# Altium PCB Buck_Converter_PCB.PcbDoc
Units mm, origin at the board's own origin, x right, y up, seen from the top; angles counter-clockwise.
Board outline 150 x 100 mm, 2 copper layers (Top Layer, Bottom Layer); 59 components, 30 nets, 152 pads, 6 vias.
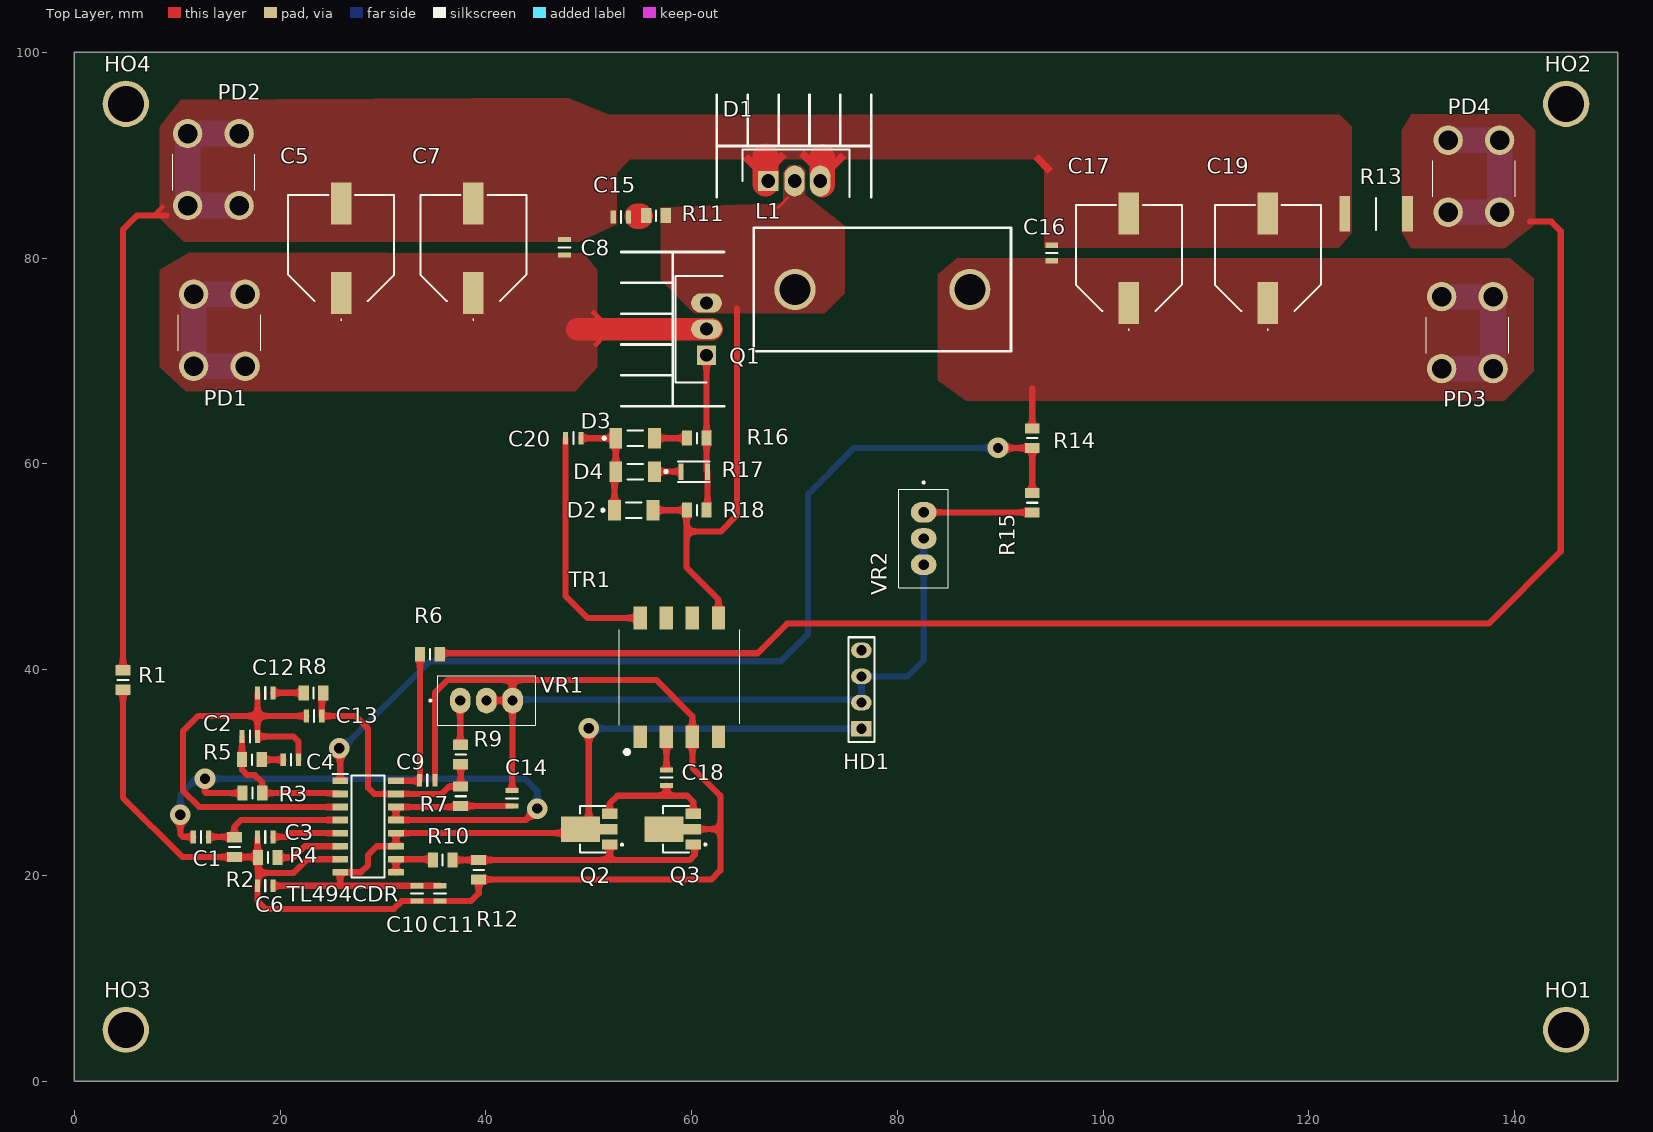
[diagram p0: Top Layer view]
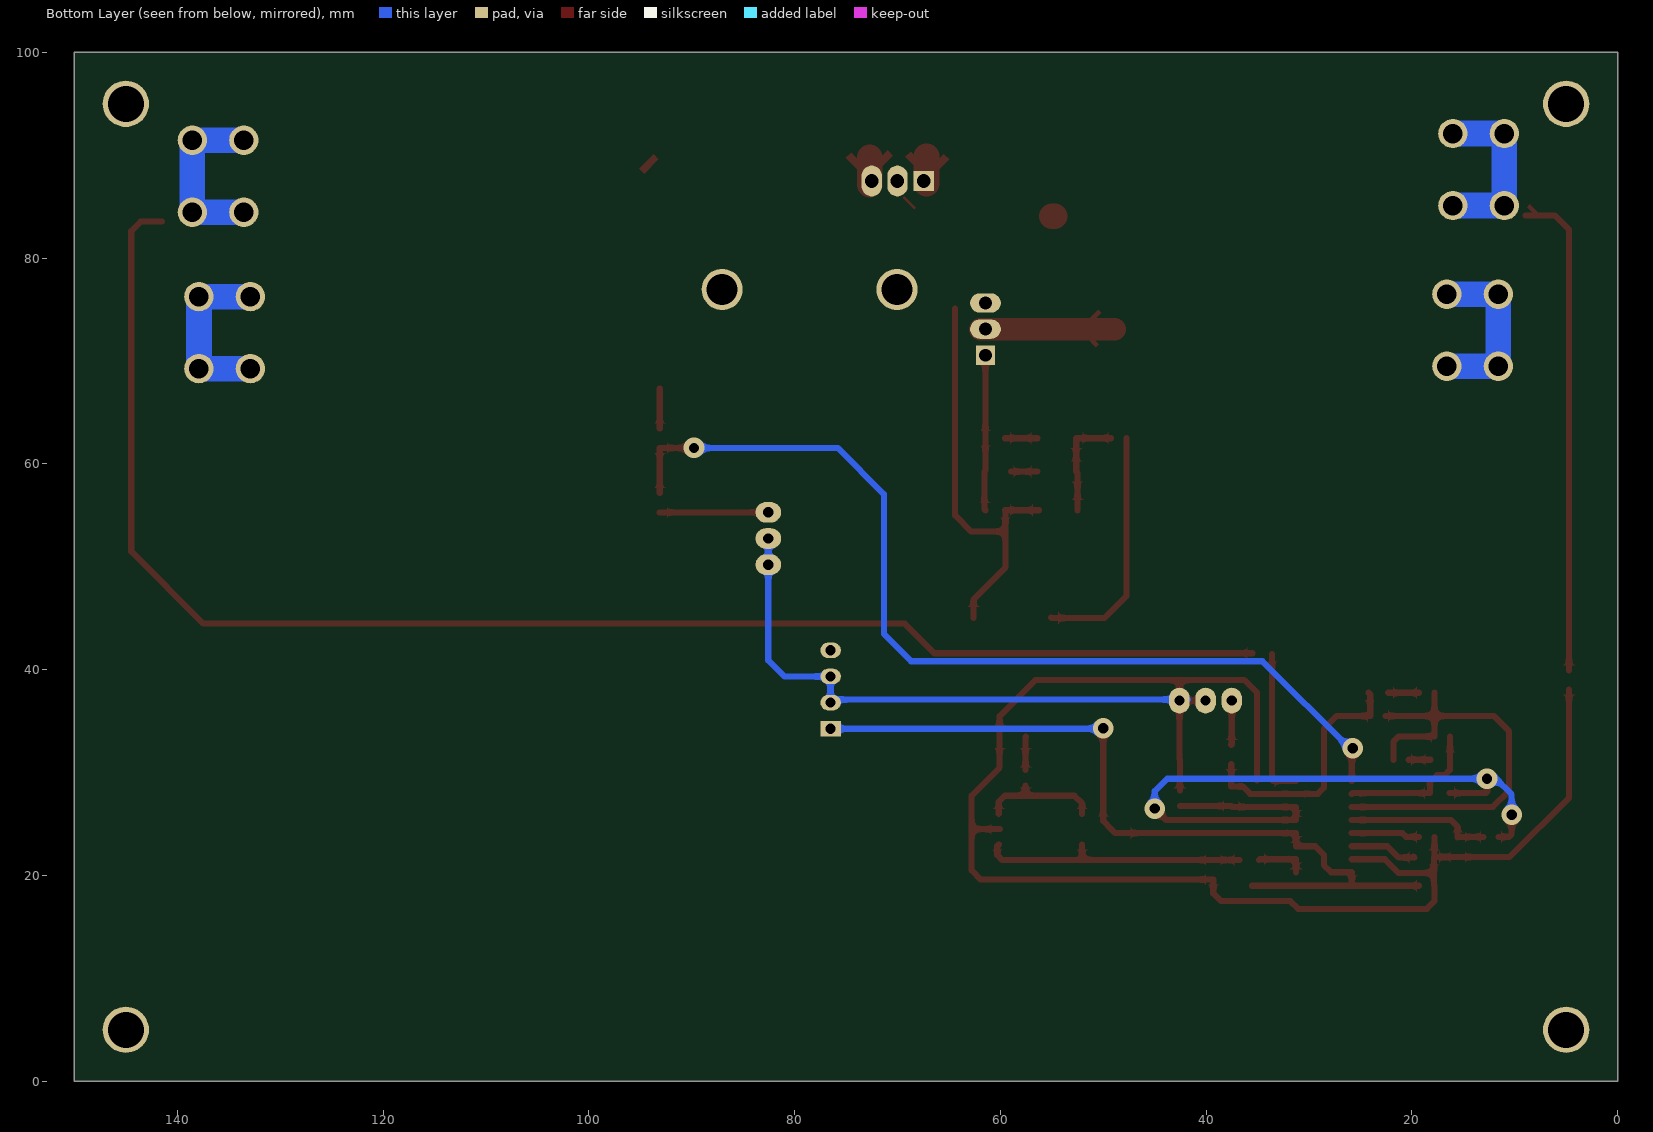
[diagram p1: Bottom Layer view, seen from below]

## Layer stack, top to bottom
Top Solder: solder mask 0.0102, Solder Resist, Dk 3.5
Top Layer: signal copper 0.0356
Dielectric 1: dielectric 0.32, FR-4, Dk 4.8
Bottom Layer: signal copper 0.0356
Bottom Solder: solder mask 0.0102, Solder Resist, Dk 3.5

## Board outline
0,0 150,0 150,100 0,100

## Design rules (kind name [scope] priority, off if disabled: settings)
Clearance [All] p1: gap=0.01
ComponentClearance [All] p1: gap=0.01 collisioncheckmode=3 verticalgap=0.254 showdistances=FALSE
HoleSize [All] p1: absolutevalues=TRUE maxlimit=4 minlimit=0.001 maxpercent=80.000 minpercent=20.000
MinimumSolderMaskSliver [All] p1: minsoldermaskwidth=0.001
PolygonConnect [All] p1: connectstyle=Direct reliefconductorwidth=0.254 reliefentries=4 polygonreliefangle="90 Angle" airgapwidth=0.254
RoutingVias [All] p1: holewidth=0.711 width=1.27 viastyle="Through Hole" minholewidth=0.711 minwidth=1.27 maxholewidth=0.711 maxwidth=1.27
SilkToSilkClearance [All] p1: silktosilkclearance=0.001
SilkToSolderMaskClearance [IsPad] p1: minsilkscreentomaskgap=0.001 clearancetoexposedcopper=TRUE
SolderMaskExpansion [All] p1: expansion=0.102
Width [All] p1: maxlimit=2.5 minlimit=0.254 preferedwidth=0.254
25 further rules are at their usual default settings.

## Components (designator, comment, footprint, x,y, rotation, side; value= is the part's Value field where it differs from the comment)
C1 "1uF" Capacitors_SMD_0805 12.3,23.75 r180 top
C2 "150pF" Capacitors_SMD_0805 17.05,33.5 r0 top
C3 "1nF" Capacitors_SMD_0805 18.55,23.75 r0 top
C4 "100nF" Capacitors_SMD_0805 21.05,31.25 r0 top
C5 "330uf" Capacitors_SMD_D10 25.933,80.975 r90 top
C6 "1uF" Capacitors_SMD_0805 18.55,19 r0 top
C7 "330uf" Capacitors_SMD_D10 38.786,80.975 r90 top
C8 "100nF" Capacitors_SMD_0805 47.625,81.051 r90 top
C9 "1nF" Capacitors_SMD_0805 34.3,29.25 r180 top
C10 "1uF" Capacitors_SMD_0805 33.3,18.25 r90 top
C11 "100nF" Capacitors_SMD_0805 35.55,18.25 r90 top
C12 "100nF" Capacitors_SMD_0805 18.55,37.75 r180 top
C13 "680pF" Capacitors_SMD_0805 23.3,35.5 r0 top
C14 "100nF" Capacitors_SMD_0805 42.55,27.5 r90 top
C15 "1nF" Capacitors_SMD_0805 53.125,84 r180 top
C16 "100nF" Capacitors_SMD_0805 95,80.5 r270 top
C17 "330uF" Capacitors_SMD_D10 102.5,80 r90 top
C18 "100nF" Capacitors_SMD_0805 57.55,29.5 r90 top
C19 "330uF" Capacitors_SMD_D10 116,80 r90 top
C20 "100nF" Capacitors_SMD_0805 48.5,62.5 r0 top
D1 "STPS20H100C" TO-220_Diode 70,87.5 r0 top
D2 "1N4148" 1N4148 54.375,55.5 r0 top
D3 "1N4148" 1N4148 54.5,62.5 r0 top
D4 "1N4148" 1N4148 54.5,59.25 r180 top
HD1 "Header 4" HDR1X4 76.5,34.26 r90 top
HO1 "HOLE" Hole 145,5 r0 top
HO2 "HOLE" Hole 145,95 r0 top
HO3 "HOLE" Hole 5,5 r0 top
HO4 "HOLE" Hole 5,95 r0 top
L1 "Inductor" Inductor 78.537,76.962 r0 top
PD1 "Terminal" Terminal 11.596,69.494 r0 top
PD2 "Terminal" Terminal 11.012,85.11 r0 top
PD3 "Terminal" Terminal 132.897,69.26 r0 top
PD4 "Terminal" Terminal 133.532,84.462 r0 top
Q1 "N-MOSFET" TO-220)N-MOSFET 61.443,73.101 r90 top
Q2 "2SCR552P" 2SCR552P 50.05,24.5 r90 top
Q3 "2SAR552P" 2SAR552P 58.15,24.5 r90 top
R1 "0R" RESISTOR_SMD_0805 4.725,39 r270 top
R2 "1K" RESISTOR_SMD_0805 15.55,22.75 r90 top
R3 "3K" RESISTOR_SMD_0805 17.3,28 r0 top
R4 "10K" RESISTOR_SMD_0805 18.8,21.75 r0 top
R5 "20K" RESISTOR_SMD_0805 17.25,31.25 r180 top
R6 "1K" RESISTOR_SMD_0805 34.55,41.5 r180 top
R7 "24K" RESISTOR_SMD_0805 37.55,27.7 r90 top
R8 "10K" RESISTOR_SMD_0805 23.25,37.75 r180 top
R9 "22R" RESISTOR_SMD_0805 37.55,31.75 r90 top
R10 "22R" RESISTOR_SMD_0805 35.8,21.5 r0 top
R11 "10R" RESISTOR_SMD_0805 56.525,84.125 r0 top
R12 "1K" RESISTOR_SMD_0805 39.3,20.55 r90 top
R13 "0R01" RESISTOR_SMD_2512 126.525,84.3 r0 top
R14 "15K" RESISTOR_SMD_0805 93.1,62.5 r90 top
R15 "1K5" RESISTOR_SMD_0805 93.1,56.225 r90 top
R16 "4R7" RESISTOR_SMD_0805 60.5,62.5 r0 top
R17 "4R7" RESISTOR_SMD_1206 60.25,59.25 r0 top
R18 "10K" RESISTOR_SMD_0805 60.5,55.5 r0 top
TL494CDR "TL494CDR" TL494CDR 28.55,24.75 r0 top
TR1 "B78307A2276A003" B78307A2276A003 58.8,39.25 r0 top
VR1 "5K" Baoter_3296 37.51,37 r180 top
VR2 "5K" Baoter_3296 82.55,55.29 r90 top

## Footprints (in the part's own frame and the unit in brackets; to place one, negate y for a bottom-side part, rotate by r counter-clockwise, add the part's x,y. Pads: shape width x height; smd on the part's side, far side on the other; paste and mask are expansions set on the pad)
1N4148 [mm]
  rect 1.25x2 smd: A(1.875,0) K(-1.875,0)
  silkscreen extent -3.12,-0.75 0.75,0.75, body extent -1.85,-0.8 1.85,0.8, height 1.6
2SAR552P [mm]
  rect 1x1.5 smd: 1(-1.5,-2) 3(1.5,-2)
  rect 2.5x3.8 smd: 2(0,0.85)
  rect 1x1.7 smd: 2(0,-1.9)
  silkscreen extent -2.25,-3.27 2.25,0.92, body extent -2.27,-2.27 2.27,1.73, height 1.6
2SCR552P [mm]
  rect 1x1.5 smd: 1(-1.5,-2) 3(1.5,-2)
  rect 2.5x3.8 smd: 2(0,0.85)
  rect 1x1.7 smd: 2(0,-1.9)
  silkscreen extent -2.25,-3.27 2.25,0.92, body extent -2.27,-2.27 2.27,1.73, height 1.6
B78307A2276A003 [mm]
  rect 1.3x2.21 smd: 1(-3.81,-5.77) 2(-1.27,-5.77) 3(1.27,-5.77) 4(3.81,-5.77) 5(3.81,5.77) 6(1.27,5.77) 7(-1.27,5.77) 8(-3.81,5.77)
  silkscreen extent -5.85,-7.3 5.85,4.65, body extent -5.94,-6.79 5.76,6.37, height 11.35
Baoter_3296 [mm]
  oval 2x2.5 hole 1: 1(0,0) 2(-2.54,0) 3(-5.08,0)
  silkscreen extent -7.3,-2.41 3,2.42
Capacitors_SMD_0805 [mm]
  rect 0.5x1.25 smd: 1(-0.75,0) 2(0.75,0)
  silkscreen extent 0,-0.58 0,0.58
Capacitors_SMD_D10 [mm]
  rect 4.1x2 smd: 1(-4.35,0) 2(4.35,0)
  silkscreen extent -7,-5.15 5.15,5.15
HDR1X4 [mm] "Connector; Header; 4 Position"
  rect 1.5x2 hole 1: 1(0,0)
  oval 1.5x2 hole 1: 2(2.54,0) 3(5.08,0) 4(7.62,0)
  silkscreen extent -1.27,-1.27 8.89,1.27
Hole [mm]
  round 4.5 hole 3.5: 1(0,0)
Inductor [mm]
  round 4 hole 3: 1(-8.5,0) 2(8.5,0)
  silkscreen extent -12.5,-6 12.5,6
RESISTOR_SMD_0805 [mm]
  rect 1x1.45 smd: 1(-0.95,0) 2(0.95,0)
  silkscreen extent 0,-0.53 0,0.53
RESISTOR_SMD_1206 [mm]
  rect 0.5x1.6 smd: 1(-1.3,0) 2(1.3,0)
  silkscreen extent -1.6,-1 1.5,1
RESISTOR_SMD_2512 [mm]
  rect 1.05x3.45 smd: 1(-3.05,0) 2(3.05,0)
  silkscreen extent 0,-1.55 0,1.55
Terminal [mm]
  round 2.85 hole 1.9: 1(0,0) 1(0,7) 1(5,0) 1(5,7)
  silkscreen extent -1.5,1.5 6.5,5
TL494CDR [mm]
  rect 1.525x0.65 smd: 1(-2.712,4.445) 2(-2.712,3.175) 3(-2.712,1.905) 4(-2.712,0.635) 5(-2.712,-0.635) 6(-2.712,-1.905) 7(-2.712,-3.175) 8(-2.712,-4.445) 9(2.712,-4.445) 10(2.712,-3.175) 11(2.712,-1.905) 12(2.712,-0.635) 13(2.712,0.635) 14(2.712,1.905) 15(2.712,3.175) 16(2.712,4.445)
  silkscreen extent -3.47,-4.95 1.6,5.12
TO-220)N-MOSFET [mm]
  rect 1.875x1.875 / inner round 1.875 / far side rect 1.875x1.875 hole 1.25: 1(-2.54,0)
  oval 1.875x3 hole 1.25: 2(0,0) 3(2.54,0)
  silkscreen extent -7.5,-1.7 7.5,8.3
TO-220_Diode [mm]
  rect 1.98x1.98 / inner round 1.98 / far side rect 1.98x1.98 hole 1.32: A1(-2.55,0)
  oval 1.98x3 hole 1.32: A2(2.5,0) K(0,0)
  silkscreen extent -7.55,-1.6 7.45,8.4

## Part data
C1: library part C1, "SMD_0805"
C2: library part C2, "SMD_0805"
C3: library part C3, "SMD_0805"
C4: library part C4, "SMD_0805"
C5: library part C5, "SMD_D10"
C6: library part C6, "SMD_0805"
C7: library part C7, "SMD_D10"
C8: library part C8, "SMD_0805"
C9: library part C9, "SMD_0805"
C10: library part C10, "SMD_0805"
C11: library part C11, "SMD_0805"
C12: library part C12, "SMD_0805"
C13: library part C13, "SMD_0805"
C14: library part C14, "SMD_0805"
C15: library part C15, "SMD_0805"
C16: library part C16, "SMD_0805"
C17: library part C17, "SMD_D10"
C18: library part C18, "SMD_0805"
C19: library part C19, "SMD_D10"
C20: library part C20, "SMD_0805"
D1: library part D1, "Schottky"
D2: library part D2, "Diode"
D3: library part D3, "Diode"
D4: library part D4, "Diode"
HD1: "Header, 4-Pin"
HO1: library part HO1
HO2: library part HO2
HO3: library part HO3
HO4: library part HO4
L1: library part L1
PD1: library part PD1
PD2: library part PD2
PD3: library part PD3
PD4: library part PD4
Q1: library part Q1
Q2: library part Q2, "NPN-BJT"
Q3: library part Q3, "PNP-BJT"
R1: library part R1, "SMD_0805"
R2: library part R2, "SMD_0805"
R3: library part R3, "SMD_0805"
R4: library part R4, "SMD_0805"
R5: library part R5, "SMD_0805"
R6: library part R6, "SMD_0805"
R7: library part R7, "SMD_0805"
R8: library part R8, "SMD_0805"
R9: library part R9, "SMD_0805"
R10: library part R10, "SMD_0805"
R11: library part R11, "SMD_0805"
R12: library part R12, "SMD_0805"
R13: library part R13, "SMD_2512"
R14: library part R14, "SMD_0805"
R15: library part R15, "SMD_0805"
R16: library part R16, "SMD_0805"
R17: library part R17, "SMD_1206"
R18: library part R18, "SMD_0805"
TL494CDR: "PWM_controller"
TR1: library part TR1, "SMDTransformers"
VR1: library part VR1, "Baoter_3296"
VR2: library part VR2, "Baoter_3296"

## Via types
v1: diameter 2, hole 1, Top Layer to Bottom Layer, 6 vias

## Nets (pads, with @x,y where several pads share a name; then routed paths per layer and width w, separated by ;. In a path a pad name is that pad's centre, name@x,y a point inside that pad or via, vN(x,y) a via of type N, cw(c..) or ccw(c..) an arc to the next point about the centre after c; other vN are vias at no path point)
5V: C1.2 C14.1 R3.1 R7.1 TL494CDR.13 TL494CDR.14 | length 75.3
  Top Layer w0.6: v1@9.7,25.6 10,25.9 v1(10.3,25.9) 10.3,24 10.55,23.75 C1.2 ; v1(12.7,29.4) 12.7,28.1 12.8,28 14.55,28 R3.1 ; C14.1 R7.1 37.455,26.655 TL494CDR.14 TL494CDR.13 43.885,25.385 v1(45,26.5)
  Bottom Layer w0.6: v1(10.3,25.9) 10.3,27.877 11.823,29.4 v1(12.7,29.4) 43.777,29.4 45,28.177 v1(45,26.5)
12V: C6.2 C10.2 C11.2 HD1.1 Q2.2 TL494CDR.8 TL494CDR.11 TL494CDR.12 | length 80.4
  Top Layer w0.6: C6.2 C10.2 C11.2 ; 25.8,19.25 25.838,19.288 TL494CDR.8 27.855,20.305 28.55,21 28.55,22 29.395,22.845 TL494CDR.11 TL494CDR.12 48.815,24.115 49.2,24.5 50,25.3 v1(50,34.3)
  Bottom Layer w0.6: v1(50,34.3) 50.04,34.26 HD1.1
AG: C3.1 C6.1 C9.1 C10.1 C11.1 C14.2 HD1.2 HD1.3 Q3.2 R1.2 R2.1 R4.1 R12.1 TL494CDR.7 TR1.3 VR1.2 VR1.3 VR2.2 VR2.3 | length 211.9
  Top Layer w0.6: R1.2 4.725,27.575 10.5,21.8 R2.1 17.8,21.8 C3.1 ; R4.1 17.85,20.25 ; TL494CDR.7 22.625,21.575 21.3,20.25 17.85,20.25 ; C9.1 35.05,37.75 36.3,39 42.59,39 ; VR1.2 VR1.3 ; C14.2 42.55,31.25 42.59,31.29 VR1.3 ; Q3.2@60.05,24.5 62.8,24.5 ; 17.85,20.25 17.85,19.05 C6.1 17.8,17.5 18.55,16.75 31.05,16.75 31.8,17.5 C10.1 C11.1 38.55,17.5 39.3,18.25 R12.1 61.9,19.6 62.8,20.5 62.8,24.5 ; VR1.3 42.59,39 ; 42.59,39 56.55,39 60.07,35.48 TR1.3 60.07,30.48 62.8,27.75 62.8,24.5
  Bottom Layer w0.6: VR1.3@41.79,37.1 76.2,37.1 HD1.2 HD1.3 80.99,39.34 82.55,40.9 VR2.3 VR2.2
CS: PD4.1 R6.1 R13.2 | length 164.6
  Top Layer w0.6: R6.1@35.5,41.6 66.4,41.6 69.275,44.475 137.45,44.475 144.475,51.5 144.475,82.625 143.55,83.55 141.5,83.55
  Bottom Layer w2.5: PD4.1@133.532,84.462 138.532,84.462 138.532,91.462 PD4.1@133.532,91.462
GATE: Q1.1 R16.2 R17.2 R18.2 | length 15.1
  Top Layer w0.6: Q1.1 61.45,70.554 R16.2 61.45,59.35 R17.2 61.55,55.6 R18.2
NetC1_1: C1.1 R2.2 TL494CDR.4 | length 14.1
  Top Layer w0.6: C1.1 15.5,23.75 R2.2 15.55,24.75 16.185,25.385 TL494CDR.4
NetC2_1: C2.1 R3.2 R5.2 TL494CDR.2 | length 14.4
  Top Layer w0.6: C2.1 R5.2 16.3,30.25 16.8,29.75 17.55,29.75 18.25,29.05 R3.2 25.763,28 TL494CDR.2
NetC2_2: C2.2 C4.2 C12.2 C13.1 TL494CDR.3 | length 44.5
  Top Layer w0.6: C12.2 17.8,35.5 ; C4.2 21.8,33 21.3,33.5 C2.2 17.8,35.5 ; C13.1 17.8,35.5 ; TL494CDR.3 12.145,26.655 10.55,28.25 10.55,34 12.05,35.5 17.8,35.5
NetC3_2: C3.2 TL494CDR.5 | length 6.7
  Top Layer w0.6: C3.2 20.55,23.75 20.915,24.115 TL494CDR.5
NetC4_1: C4.1 R5.1 | length 2.1
  Top Layer w0.6: R5.1 C4.1
NetC5_1: C5.1 C7.1 C8.1 PD1.1 Q1.2 | length 30
  Top Layer w2.2: 48.895,73.101 Q1.2 Q1.2@61.925,73.101
  Bottom Layer w2.5: PD1.1@16.596,69.494 11.596,69.494 11.596,76.494 PD1.1@16.596,76.494
NetC9_2: C9.2 R6.2 TL494CDR.16 | length 14.6
  Top Layer w0.6: TL494CDR.16 33.495,29.195 C9.2 33.6,29.3 R6.2
NetC12_1: C12.1 R8.2 | length 3
  Top Layer w0.6: C12.1 R8.2
NetC13_2: C13.2 R7.2 R8.1 R9.1 TL494CDR.15 | length 24.8
  Top Layer w0.6: R8.1 24.05,37.6 C13.2 27.3,35.5 28.55,34.25 28.55,28.5 29.125,27.925 TL494CDR.15 35.725,27.925 36.45,28.65 R7.2 R9.1
NetC15_1: C15.1 R11.1 | length 0.2
  Top Layer w2.5: 54.725,84.075 54.975,84.075
NetC16_2: C16.2 C17.1 C19.1 L1.2 PD3.1 R14.2 | length 20.9
  Top Layer w0.6: R14.2 93.1,67.325
  Bottom Layer w2.5: PD3.1@132.897,69.26 137.897,69.26 137.897,76.26 PD3.1@132.897,76.26
NetC18_1: C18.1 Q2.3 Q3.3 | length 11.8
  Top Layer w0.6: Q2.3 52.05,27 52.8,27.75 57.55,27.75 ; C18.1 57.55,27.75 ; Q3.3 60.15,27.15 59.55,27.75 57.55,27.75
NetC18_2: C18.2 TR1.2 | length 3.2
  Top Layer w0.6: TR1.2 57.55,33.46 C18.2
NetC20_1: C20.1 TR1.8 | length 23.6
  Top Layer w0.6: C20.1 47.75,47.15 49.88,45.02 TR1.8 TR1.8@55.05,45.08
NetC20_2: C20.2 D2.K D3.K D4.A | length 10.4
  Top Layer w0.6: C20.2 D3.K D4.A 52.5,59.125 D2.K
NetD3_A: D3.A R16.1 | length 3.2
  Top Layer w0.6: D3.A R16.1
NetD4_K: D4.K R17.1 | length 2.6
  Top Layer w0.6: D4.K R17.1
NetQ2_1: Q2.1 Q3.1 R10.2 R12.2 | length 26.3
  Top Layer w0.6: R10.2 R12.2 52.05,21.5 ; Q2.1 52.05,21.5 ; Q3.1 60.3,22.85 60.3,22 59.8,21.5 52.55,21.5 52.05,21.5
NetR4_2: R4.2 TL494CDR.6 | length 6.7
  Top Layer w0.6: R4.2@19.845,21.845 R4.2 21.3,21.75 22.395,22.845 TL494CDR.6
NetR9_2: R9.2 VR1.1 | length 4.3
  Top Layer w0.6: VR1.1 37.51,32.74 R9.2
NetR10_1: R10.1 TL494CDR.9 TL494CDR.10 | length 4.9
  Top Layer w0.6: TL494CDR.9 TL494CDR.10 34.775,21.575 R10.1
NetR15_1: R15.1 VR2.1 | length 10.6
  Top Layer w0.6: VR2.1 93.085,55.29 R15.1
PG: C5.2 C7.2 C8.2 C15.2 C16.1 C17.2 C19.2 D1.A1 D1.A2 PD2.1 R1.1 R13.1 | length 69.9
  Top Layer w0.6: R1.1 4.725,82.75 6.125,84.15 8.925,84.15
  Top Layer w2.5: D1.A1@67.175,87.25 67.175,89.9 ; D1.A2@72.7,87.125 72.7,89.775
  Bottom Layer w2.5: PD2.1@16.012,85.11 11.012,85.11 11.012,92.11 PD2.1@16.012,92.11
REF: D1.K D2.A L1.1 Q1.3 R11.2 R18.1 TR1.5 | length 40.7
  Top Layer w0.6: D2.A R18.1 59.5,55.45 59.5,53.425 ; TR1.5 62.61,46.81 59.5,49.92 59.5,53.425 ; 64.4,75.075 64.4,55 62.825,53.425 59.5,53.425
VFB: R14.1 R15.2 TL494CDR.1 | length 95
  Top Layer w0.6: v1(25.756,32.36) 25.838,32.277 TL494CDR.1 ; v1(89.775,61.55) R14.1 R15.2
  Bottom Layer w0.6: v1(25.756,32.36) 26.06,32.36 34.521,40.82 68.67,40.82 71.32,43.47 71.32,57.07 75.8,61.55 v1(89.775,61.55)
pads on no net: HD1.4 HO1.1 HO2.1 HO3.1 HO4.1 TR1.1 TR1.4 TR1.6 TR1.7

## Polygon pours and split planes (outlines as drawn)
NetC5_1 on Top Layer "Top Layer-No Net" (solid, pour order 36): 11.217,80.586 8.317,78.886 8.317,69.386 10.817,67.086 8.517,67.086 50.817,67.086 48.717,67.086 50.817,69.386 50.817,78.886 49.517,80.486 50.817,80.386 50.71,80.493
PG on Top Layer "Top Layer-No Net" (solid, pour order 34): 8.317,95.386 10.317,95.386 8.317,92.786 8.317,83.886 10.617,81.586 50.417,81.586 50.717,81.886 50.417,81.586 49.117,81.586 52.746,83.275 52.737,84.1 52.712,86.451 52.657,91.702 52.738,93.666 47.916,95.573 50.817,95.586
NetC16_2 on Top Layer "Top Layer-No Net" (solid, pour order 38): 94,80 141.825,80 139.5,80 141.825,78.025 141.825,68.996 138.979,66.15 86.643,66.15 83.9,68.15 83.9,78.425 85.75,80 83.9,80
PG on Top Layer "Top Layer-No Net" (solid, pour order 42): 94.275,81 124.15,81 122.9,81 124.15,82.475 124.15,92.775 122.975,93.95 124.15,93.95 94.275,93.95
CS on Top Layer "Top Layer-No Net" (solid, pour order 44): 129,87.5 129,82.5 129.925,80.975 129,80.975 139.024,80.975 142,83.3 142,85.625 142,92.425 140.463,93.962 142,94 129,94 129.925,94 129,92.425
REF on Top Layer "Top Layer-No Net" (solid, pour order 46): 56.975,84.932 56.975,84.075 56.975,77.9 60.225,74.65 72.95,74.65 74.875,76.575 74.875,82.3 74.875,83.15 71.025,86.15 71.025,88.575 70.575,89.025 71.175,89.025 69,89.025 68.975,89 68.9,88.925 69.45,89.025 68.9,88.35 68.9,85.356
PG on Top Layer "Top Layer-No Net" (solid, pour order 48): 52.076,93.95 94.3,93.95 94.3,89.6 54.05,89.6 52.002,87.552

## Other copper
Top Layer:
  region net NetC5_1: 50.724,71.323 51.694,72.293 51.37,72.616 50.401,71.646
  region net NetC5_1: 51.458,74.055 50.488,75.025 50.165,74.701 51.135,73.732
  region net REF: 68.35,84.7 69.499,85.849 69.322,86.026 68.173,84.877
  region net PG: 68.125,88.7 69.275,89.85 68.727,90.398 67.577,89.248
  region net PG: 66.625,89 65.475,90.15 64.927,89.602 66.077,88.452
  region net PG: 73.9,88.6 75.05,89.75 74.502,90.298 73.352,89.148
  region net PG: 72.1,89.35 70.95,90.5 70.402,89.952 71.552,88.802
  region net PG: 95.138,88.688 93.706,90.12 93.193,89.607 94.625,88.175
  region net PG: 7.976,84.101 8.825,84.95 8.524,85.251 7.676,84.402